# Altium PCB 主板-双BH(1).PcbDoc (part 7 of 13)
Units mm, origin at the board's own origin, x right, y up, seen from the top; angles counter-clockwise.
Board outline 97.69 x 103.45 mm, 2 copper layers (Top Layer, Bottom Layer); 78 components, 75 nets, 243 pads, 279 vias.
Unrouted connection lines stored in the file: 7.
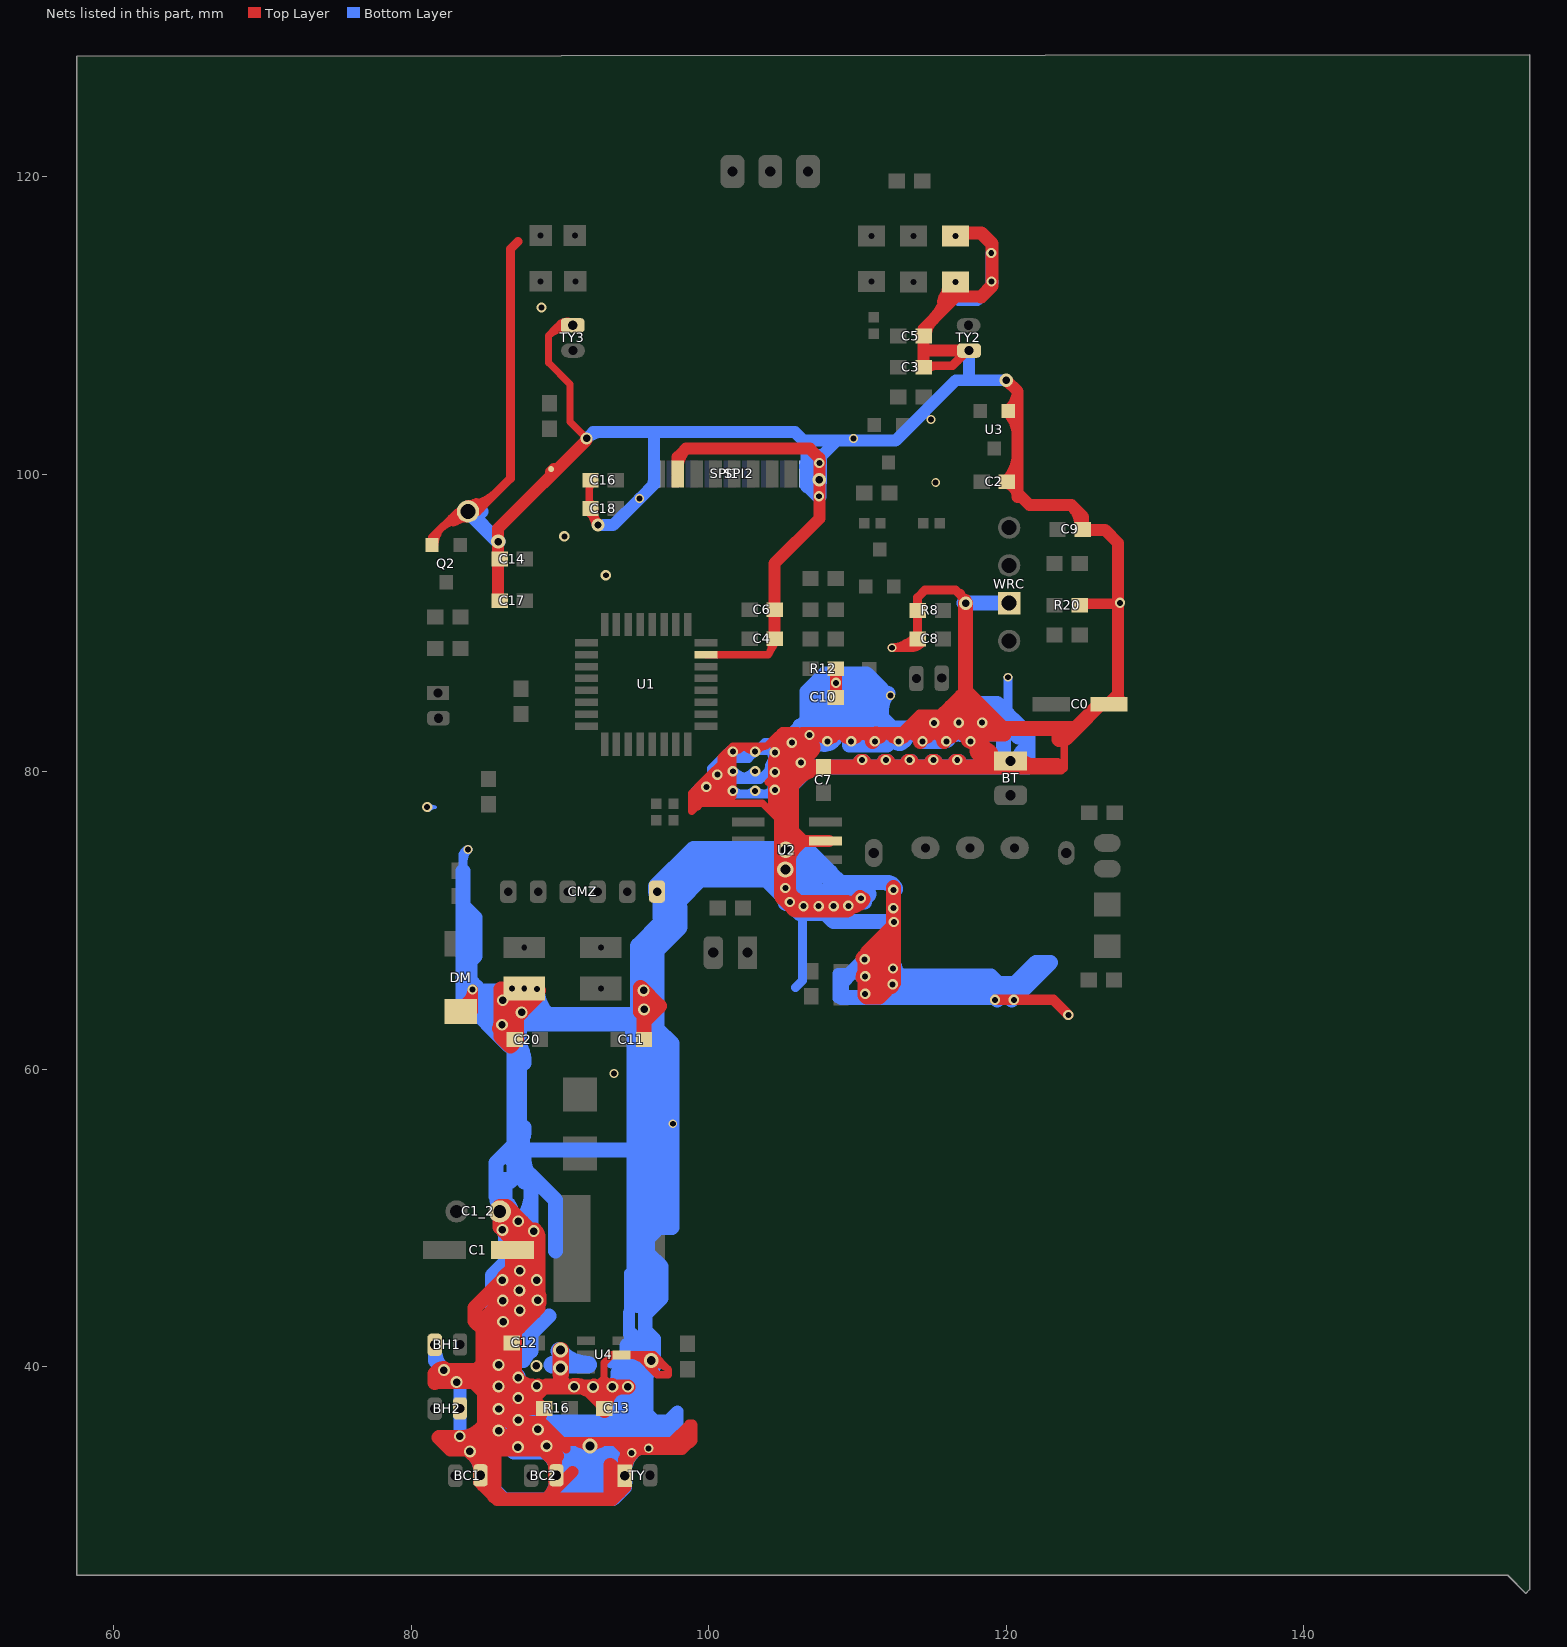
[diagram p7: the nets of this part, all layers, seen from the top]

## Via types
v1: diameter 0.7, hole 0.4, Top Layer to Bottom Layer, 108 vias
v2: diameter 0.68, hole 0.4, Top Layer to Bottom Layer, 87 vias
v3: diameter 0.8, hole 0.5, Top Layer to Bottom Layer, tented both sides, 33 vias
v4: diameter 0.6, hole 0.4, Top Layer to Bottom Layer, 12 vias
v5: diameter 0.9, hole 0.5, Top Layer to Bottom Layer, 8 vias
v6: diameter 0.8, hole 0.5, Top Layer to Bottom Layer, 6 vias
v7: diameter 1, hole 0.75, Top Layer to Bottom Layer, tented both sides, 5 vias
v8: diameter 3.4, hole 2.9, Top Layer to Bottom Layer, 4 vias
v9: diameter 1, hole 0.6, Top Layer to Bottom Layer, tented both sides, 3 vias
v10: diameter 1, hole 0.56, Top Layer to Bottom Layer, tented both sides, 2 vias
v11: diameter 1.1, hole 0.68, Top Layer to Bottom Layer, 2 vias
v12: diameter 0.8, hole 0.4, Top Layer to Bottom Layer, 2 vias
v13: diameter 0.65, hole 0.4, Top Layer to Bottom Layer, tented both sides, 2 vias
v14: diameter 1, hole 0.6, Top Layer to Bottom Layer, tented bottom, 1 vias
v15: diameter 0.7, hole 0.4, Top Layer to Bottom Layer, tented bottom, 1 vias
v16: diameter 0.95, hole 0.5, Top Layer to Bottom Layer, 1 vias
v17: diameter 0.64, hole 0.4, Top Layer to Bottom Layer, 1 vias
v18: diameter 0.62, hole 0.4, Top Layer to Bottom Layer, 1 vias

## Nets (pads, with @x,y where several pads share a name; then routed paths per layer and width w, separated by ;. In a path a pad name is that pad's centre, name@x,y a point inside that pad or via, vN(x,y) a via of type N, cw(c..) or ccw(c..) an arc to the next point about the centre after c; other vN are vias at no path point) (continued)
GND: (continued)
  Top Layer w1: 85.039,42.164 85.039,38.532 85.547,38.024 ; 85.581,31.783 85.581,34.468 ; v3@85.935,62.746 ccw(c87.322,63.547) C20.1@86.908,62 ; v3@86.081,64.708 cw(c87.6,63.403) pad.0@87.6,65.406 ; v3(86.131,45.822) 84.277,43.967 84.277,43.078 84.811,42.545 84.811,40.157 84.404,39.751 ; v3(86.157,44.45) 84.811,43.104 85.166,43.104 ; C1_2.1@86.188,50.365 ccw(c86.81,50.164) 86.348,49.703 ; v3@86.208,43.282 86.208,45.974 86.8,46.566 C1.1@86.8,47.84 C1.1@86.8,48.26 ; 86.23,62.452 cw(c86.77,62.992) v3@86.006,62.992 ; C12.2@86.276,41.437 86.276,37.295 ; v3@86.276,62.929 86.766,63.419 pad.0@86.766,65.406 ; 86.279,49.634 ccw(c85.338,49.382) C1_2.1@85.825,50.225 ; 86.284,40.97 v3@86.284,43.078 ; C12.2@86.309,41.529 86.309,40.03 86.88,39.505 86.944,39.446 86.944,38.799 ; 86.614,44.45 86.614,45.339 ; v1(86.766,65.43) pad.0@86.766,65.406 ; 86.843,36.195 86.652,36.386 ; v3@86.944,39.497 86.944,43.663 v3@86.294,44.313 ; 87.071,63.378 87.071,61.951 86.677,61.557 86.03,62.205 ; v3(87.427,63.83) pad.0@87.427,65.329 ; v3@88.062,45.745 87.68,45.364 87.68,45.229 ; 88.316,37.311 88.316,37.922 ; 88.67,36.195 87.774,36.195 87.376,36.195 87.148,36.423 v3@86.919,36.652 ; 88.91,38.643 88.875,38.608 ; 89,38.649 89.762,38.649 90.957,38.649 92.227,38.65 92.371,38.65 92.964,38.65 92.989,38.65 ; v3(89.103,34.671) 89.298,34.671 89.764,34.671 89.84,34.671 ; v3@89.205,34.569 89.399,34.569 89.738,34.569 89.764,34.595 89.84,34.671 ; 89.764,34.011 89.306,34.468 85.581,34.468 ; 90.043,39.1 v9(90.043,41.123) ; v6(92.227,38.647) 90.957,38.647 91.757,38.647 92.98,37.424 C13.2@92.98,37.2 ; C13.2@92.989,37.2 92.989,38.648 92.989,38.65 ; 92.989,38.71 92.989,38.65 ; TY.2@94.298,32.741 TY.2@94.364,32.674 ; v6@94.564,38.65 93.523,38.65 92.989,38.65 ; C11.2@95.65,62 95.65,63.633 95.428,63.856 v3@95.428,65.507 ; 95.86,63.424 96.685,64.249 ; 105.588,76.124 105.588,79.121 106.782,80.315 BT.2@121.218,80.315 ; v1@109.271,70.968 v1@109.601,70.968 ; v1@110.185,71.552 v1@109.601,70.968 ; v1@110.96,82.245 111.239,82.525 111.252,82.537 ; 111.633,67.869 110.668,67.869 v1@112.42,69.621 ; 111.735,66.167 111.735,66.192 ; 111.735,68.758 111.735,66.531 ; v1@112.166,65.761 v1@112.116,65.811 ; v1@112.344,66.531 111.735,66.531 ; v1@112.42,72.212 v1(112.42,72.06) v1(112.42,70.841) v1@112.42,69.621 ; 114.592,82.537 114.833,82.779 ; 114.706,82.779 115.646,83.718 116.279,84.351 116.98,85.052 117.17,84.861 117.17,84.684 ; 115.265,82.779 116.205,83.718 116.838,84.351 ; 116.027,82.525 116.04,82.537 116.218,82.715 v1(116.815,83.312) ; v5(117.272,91.338) 117.272,85.42 119.786,82.906 ; v1(117.602,82.042) 118.059,82.499 ; 118.681,82.537 119.875,82.537 ; 123.546,82.169 123.546,82.906 ; 124.003,82.245 124.663,82.906 ; 124.003,82.525 124.231,82.525 ; C0.2@126.303,84.546 124.663,82.906 ; 81.585,38.949 cw(c82.611,38.949) v3@82.149,39.866 ; 81.585,38.949 cw(c82.611,38.949) v3@82.149,39.866 ; 81.585,38.949 cw(c82.611,38.949) v3@82.149,39.866 ; 81.585,39.116 cw(c82.367,39.116) v3@82.169,39.873 ; 81.585,39.116 cw(c82.367,39.116) v3@82.169,39.873 ; 81.585,39.116 cw(c82.367,39.116) v3@82.169,39.873 ; 81.758,39.696 cw(c82.194,39.259) v3@82.194,39.876 ; 81.758,39.696 cw(c82.194,39.259) v3@82.194,39.876 ; 81.758,39.696 cw(c82.194,39.259) v3@82.194,39.876 ; v3@81.813,39.751 cw(c81.813,38.181) v3@83.143,39.017 ; v3@81.813,39.751 cw(c81.813,38.181) v3@83.143,39.017 ; v3@81.813,39.751 cw(c81.813,38.181) v3@83.143,39.017 ; v3@81.813,39.751 84.404,39.751 ; v3@81.813,39.751 81.585,39.522 81.585,39.218 81.813,38.989 84.226,38.989 84.912,38.303 84.912,36.068 ; v3@82.124,39.706 ccw(c83.854,41.436) 83.854,38.989 ; v3@82.124,39.706 ccw(c83.854,41.436) 83.854,38.989 ; v3@82.124,39.706 ccw(c83.854,41.436) 83.854,38.989 ; v3@82.977,39.022 cw(c84.404,37.989) 84.404,39.751 ; v3@82.977,39.022 cw(c84.404,37.989) 84.404,39.751 ; v3@82.977,39.022 cw(c84.404,37.989) 84.404,39.751 ; v3@83.261,35.231 ccw(c83.261,37.198) 84.651,35.807 ; v3@83.261,35.231 ccw(c83.261,37.198) 84.651,35.807 ; v3@83.261,35.231 ccw(c83.261,37.198) 84.651,35.807 ; v3@83.82,34.468 84.607,33.68 ; v3@83.82,34.468 82.652,34.468 81.864,35.255 84.099,35.255 84.912,36.068 ; v3@83.82,34.468 84.912,34.468 ; v3@84.236,34.052 cw(c83.154,32.97) BC1.1@84.684,32.97 ; v3@84.236,34.052 cw(c83.154,32.97) BC1.1@84.684,32.97 ; v3@84.236,34.052 cw(c83.154,32.97) BC1.1@84.684,32.97 ; 84.607,33.68 cw(c84.202,33.275) BC1.1@84.681,32.959 ; 84.607,33.68 cw(c84.202,33.275) BC1.1@84.681,32.959 ; 84.607,33.68 cw(c84.202,33.275) BC1.1@84.681,32.959 ; BC1.1@84.651,32.985 cw(c85.052,32.534) 85.479,32.961 ; BC1.1@84.651,32.985 cw(c85.052,32.534) 85.479,32.961 ; BC1.1@84.651,32.985 cw(c85.052,32.534) 85.479,32.961 ; BC1.1@84.668,32.45 cw(c84.411,31.308) 85.581,31.308 ; BC1.1@84.668,32.45 cw(c84.411,31.308) 85.581,31.308 ; BC1.1@84.668,32.45 cw(c84.411,31.308) 85.581,31.308 ; BC1.1@84.673,32.952 ccw(c83.861,34.468) 85.581,34.468 ; BC1.1@84.673,32.952 ccw(c83.861,34.468) 85.581,34.468 ; BC1.1@84.673,32.952 ccw(c83.861,34.468) 85.581,34.468 ; BC1.1@84.675,32.953 ccw(c83.651,34.468) 85.479,34.468 ; BC1.1@84.675,32.953 ccw(c83.651,34.468) 85.479,34.468 ; BC1.1@84.675,32.953 ccw(c83.651,34.468) 85.479,34.468 ; BC1.1@84.678,32.956 ccw(c84.113,33.521) 84.912,33.521 ; BC1.1@84.678,32.956 ccw(c84.113,33.521) 84.912,33.521 ; BC1.1@84.678,32.956 ccw(c84.113,33.521) 84.912,33.521 ; BC1.1@84.678,32.956 ccw(c84.113,33.521) 84.912,33.521 ; BC1.1@84.678,32.956 ccw(c84.113,33.521) 84.912,33.521 ; BC1.1@84.678,32.956 ccw(c84.113,33.521) 84.912,33.521 ; BC1.1@84.889,33.425 cw(c84.693,32.559) 85.581,32.559 ; BC1.1@84.889,33.425 cw(c84.693,32.559) 85.581,32.559 ; BC1.1@84.889,33.425 cw(c84.693,32.559) 85.581,32.559 ; 84.912,34.468 84.912,36.068 ; 84.912,34.468 85.479,34.468 ; 84.912,34.468 84.912,33.528 85.479,32.961 ; 84.912,36.068 85.547,35.433 ; 85.007,35.973 ccw(c85.877,36.843) v3@85.877,35.612 ; 85.007,35.973 ccw(c85.877,36.843) v3@85.877,35.612 ; 85.007,35.973 ccw(c85.877,36.843) v3@85.877,35.612 ; 85.039,38.35 cw(c87.66,38.35) v3@85.807,40.203 ; 85.039,38.35 cw(c87.66,38.35) v3@85.807,40.203 ; 85.039,38.35 cw(c87.66,38.35) v3@85.807,40.203 ; 85.039,40.466 ccw(c87.66,40.466) v3@85.807,38.613 ; 85.039,40.466 ccw(c87.66,40.466) v3@85.807,38.613 ; 85.039,40.466 ccw(c87.66,40.466) v3@85.807,38.613 ; 85.039,41.914 ccw(c87.66,41.914) v3@85.807,40.061 ; 85.039,41.914 ccw(c87.66,41.914) v3@85.807,40.061 ; 85.039,41.914 ccw(c87.66,41.914) v3@85.807,40.061 ; 85.166,43.104 ccw(c85.81,43.748) v3@86.228,42.939 ; 85.166,43.104 ccw(c85.81,43.748) v3@86.228,42.939 ; 85.166,43.104 ccw(c85.81,43.748) v3@86.228,42.939 ; 85.166,43.104 85.547,42.723 85.547,38.024 ; 85.479,32.961 85.479,34.468 ; 85.479,34.468 85.479,35.247 85.547,35.247 ; 85.479,34.468 85.547,34.468 ; 85.479,34.992 cw(c86.598,34.992) v3@85.807,35.783 ; 85.479,34.992 cw(c86.598,34.992) v3@85.807,35.783 ; 85.479,34.992 cw(c86.598,34.992) v3@85.807,35.783 ; 85.479,35.1 cw(c86.357,35.1) v3@85.816,35.791 ; 85.479,35.1 cw(c86.357,35.1) v3@85.816,35.791 ; 85.479,35.1 cw(c86.357,35.1) v3@85.816,35.791 ; 85.547,34.468 85.547,35.247 ; 85.547,34.468 85.581,34.468 ; 85.547,35.157 cw(c86.433,35.157) v3@85.807,35.783 ; 85.547,35.157 cw(c86.433,35.157) v3@85.807,35.783 ; 85.547,35.157 cw(c86.433,35.157) v3@85.807,35.783 ; 85.547,35.157 cw(c86.433,35.157) v3@85.807,35.783 ; 85.547,35.157 cw(c86.433,35.157) v3@85.807,35.783 ; 85.547,35.157 cw(c86.433,35.157) v3@85.807,35.783 ; 85.547,35.157 cw(c86.433,35.157) v3@85.807,35.783 ; 85.547,35.157 cw(c86.433,35.157) v3@85.807,35.783 ; 85.547,35.157 cw(c86.433,35.157) v3@85.807,35.783 ; 85.547,35.247 85.547,35.433 ; 85.547,35.247 85.581,35.247 ; 85.547,35.28 cw(c86.169,35.28) v3@85.822,35.795 ; 85.547,35.28 cw(c86.169,35.28) v3@85.822,35.795 ; 85.547,35.28 cw(c86.169,35.28) v3@85.822,35.795 ; 85.547,35.28 cw(c86.169,35.28) v3@85.822,35.795 ; 85.547,35.28 cw(c86.169,35.28) v3@85.822,35.795 ; 85.547,35.28 cw(c86.169,35.28) v3@85.822,35.795 ; 85.547,35.433 85.581,35.4 85.581,35.247 ; 85.547,35.433 85.547,38.024 ; 85.547,36.268 ccw(c86.433,36.268) v3@85.807,35.642 ; 85.547,36.268 ccw(c86.433,36.268) v3@85.807,35.642 ; 85.547,36.268 ccw(c86.433,36.268) v3@85.807,35.642 ; 85.547,36.604 cw(c86.433,36.604) v3@85.807,37.231 ; 85.547,36.604 cw(c86.433,36.604) v3@85.807,37.231 ; 85.547,36.604 cw(c86.433,36.604) v3@85.807,37.231 ; 85.547,37.716 ccw(c86.433,37.716) v3@85.807,37.089 ; 85.547,37.716 ccw(c86.433,37.716) v3@85.807,37.089 ; 85.547,37.716 ccw(c86.433,37.716) v3@85.807,37.089 ; 85.547,38.024 86.276,37.295 ; 85.547,38.128 cw(c86.433,38.128) v3@85.807,38.755 ; 85.547,38.128 cw(c86.433,38.128) v3@85.807,38.755 ; 85.547,38.128 cw(c86.433,38.128) v3@85.807,38.755 ; 85.547,38.128 cw(c86.433,38.128) v3@85.807,38.755 ; 85.547,38.128 cw(c86.433,38.128) v3@85.807,38.755 ; 85.547,38.128 cw(c86.433,38.128) v3@85.807,38.755 ; 85.547,38.128 cw(c86.433,38.128) v3@85.807,38.755 ; 85.547,38.128 cw(c86.433,38.128) v3@85.807,38.755 ; 85.547,38.128 cw(c86.433,38.128) v3@85.807,38.755 ; 85.547,39.24 ccw(c86.433,39.24) v3@85.807,38.613 ; 85.547,39.24 ccw(c86.433,39.24) v3@85.807,38.613 ; 85.547,39.24 ccw(c86.433,39.24) v3@85.807,38.613 ; 85.547,39.576 cw(c86.433,39.576) v3@85.807,40.203 ; 85.547,39.576 cw(c86.433,39.576) v3@85.807,40.203 ; 85.547,39.576 cw(c86.433,39.576) v3@85.807,40.203 ; 85.547,40.688 ccw(c86.433,40.688) v3@85.807,40.061 ; 85.547,40.688 ccw(c86.433,40.688) v3@85.807,40.061 ; 85.547,40.688 ccw(c86.433,40.688) v3@85.807,40.061 ; 85.547,41.736 cw(c87.474,41.736) v3@86.111,43.098 ; 85.547,41.736 cw(c87.474,41.736) v3@86.111,43.098 ; 85.547,41.736 cw(c87.474,41.736) v3@86.111,43.098 ; 85.547,42.323 cw(c86.378,42.323) v3@86.155,43.124 ; 85.547,42.323 cw(c86.378,42.323) v3@86.155,43.124 ; 85.547,42.323 cw(c86.378,42.323) v3@86.155,43.124 ; 85.581,34.468 85.581,35.247 ; 85.581,35.237 cw(c86.352,35.237) v3@85.807,35.783 ; 85.581,35.237 cw(c86.352,35.237) v3@85.807,35.783 ; 85.581,35.237 cw(c86.352,35.237) v3@85.807,35.783 ; 85.581,35.237 cw(c86.352,35.237) v3@85.807,35.783 ; 85.581,35.237 cw(c86.352,35.237) v3@85.807,35.783 ; 85.581,35.237 cw(c86.352,35.237) v3@85.807,35.783 ; 85.581,35.237 cw(c86.352,35.237) v3@85.807,35.783 ; 85.581,35.237 cw(c86.352,35.237) v3@85.807,35.783 ; 85.581,35.237 cw(c86.352,35.237) v3@85.807,35.783 ; 85.581,35.247 87.165,35.247 ; 85.581,35.281 cw(c86.251,35.281) v3@85.812,35.788 ; 85.581,35.281 cw(c86.251,35.281) v3@85.812,35.788 ; 85.581,35.281 cw(c86.251,35.281) v3@85.812,35.788 ; 85.671,37.9 cw(c84.931,37.16) v3@85.977,37.16 ; 85.671,37.9 cw(c84.931,37.16) v3@85.977,37.16 ; 85.671,37.9 cw(c84.931,37.16) v3@85.977,37.16 ; v3@85.778,38.694 ccw(c87.499,38.519) 86.276,37.295 ; v3@85.778,38.694 ccw(c87.499,38.519) 86.276,37.295 ; v3@85.778,38.694 ccw(c87.499,38.519) 86.276,37.295 ; C1_2.1@85.793,50.247 cw(c84.898,49.135) v3@86.317,49.288 ; C1_2.1@85.793,50.247 cw(c84.898,49.135) v3@86.317,49.288 ; C1_2.1@85.793,50.247 cw(c84.898,49.135) v3@86.317,49.288 ; v3@85.807,35.642 ccw(c86.759,36.594) 86.759,35.247 ; v3@85.807,35.642 ccw(c86.759,36.594) 86.759,35.247 ; v3@85.807,35.642 ccw(c86.759,36.594) 86.759,35.247 ; C1_2.1@85.825,50.225 cw(c85.111,48.989) v3@86.49,49.358 ; C1_2.1@85.825,50.225 cw(c85.111,48.989) v3@86.49,49.358 ; C1_2.1@85.825,50.225 cw(c85.111,48.989) v3@86.49,49.358 ; 85.839,35.247 cw(c85.839,33.261) v3@87.244,34.666 ; 85.839,35.247 cw(c85.839,33.261) v3@87.244,34.666 ; 85.839,35.247 cw(c85.839,33.261) v3@87.244,34.666 ; v3@85.877,37.26 cw(c85.877,36.214) 86.617,36.954 ; v3@85.877,37.26 cw(c85.877,36.214) 86.617,36.954 ; v3@85.877,37.26 cw(c85.877,36.214) 86.617,36.954 ; v3@85.906,40.228 cw(c85.747,39.688) 86.309,39.688 ; v3@85.906,40.228 cw(c85.747,39.688) 86.309,39.688 ; v3@85.906,40.228 cw(c85.747,39.688) 86.309,39.688 ; v3@85.927,37.247 cw(c85.585,36.647) 86.276,36.647 ; v3@85.927,37.247 cw(c85.585,36.647) 86.276,36.647 ; v3@85.927,37.247 cw(c85.585,36.647) 86.276,36.647 ; v3@85.927,37.247 cw(c85.585,36.647) 86.276,36.647 ; v3@85.927,37.247 cw(c85.585,36.647) 86.276,36.647 ; v3@85.927,37.247 cw(c85.585,36.647) 86.276,36.647 ; v3@85.934,37.243 cw(c85.495,36.597) 86.276,36.597 ; v3@85.934,37.243 cw(c85.495,36.597) 86.276,36.597 ; v3@85.934,37.243 cw(c85.495,36.597) 86.276,36.597 ; 85.947,37.865 cw(c85.267,37.472) v3@85.966,37.115 ; 85.947,37.865 cw(c85.267,37.472) v3@85.966,37.115 ; 85.947,37.865 cw(c85.267,37.472) v3@85.966,37.115 ; 85.947,37.865 cw(c85.267,37.472) v3@85.966,37.115 ; 85.947,37.865 cw(c85.267,37.472) v3@85.966,37.115 ; 85.947,37.865 cw(c85.267,37.472) v3@85.966,37.115 ; v3@85.948,37.089 ccw(c85.157,37.881) 86.276,37.881 ; v3@85.948,37.089 ccw(c85.157,37.881) 86.276,37.881 ; v3@85.948,37.089 ccw(c85.157,37.881) 86.276,37.881 ; v3@85.948,38.613 ccw(c85.157,39.405) 86.276,39.405 ; v3@85.948,38.613 ccw(c85.157,39.405) 86.276,39.405 ; v3@85.948,38.613 ccw(c85.157,39.405) 86.276,39.405 ; v3@85.948,38.755 cw(c85.157,37.964) 86.276,37.964 ; v3@85.948,38.755 cw(c85.157,37.964) 86.276,37.964 ; v3@85.948,38.755 cw(c85.157,37.964) 86.276,37.964 ; v3@85.948,40.061 ccw(c85.076,40.933) 86.309,40.933 ; v3@85.948,40.061 ccw(c85.157,40.852) 86.276,40.852 ; v3@85.948,40.061 ccw(c85.076,40.933) 86.309,40.933 ; v3@85.948,40.061 ccw(c85.157,40.852) 86.276,40.852 ; v3@85.948,40.061 ccw(c85.076,40.933) 86.309,40.933 ; v3@85.948,40.061 ccw(c85.157,40.852) 86.276,40.852 ; v3@85.948,40.203 cw(c85.157,39.412) 86.276,39.412 ; v3@85.948,40.203 cw(c85.157,39.412) 86.276,39.412 ; v3@85.948,40.203 cw(c85.157,39.412) 86.276,39.412 ; C1_2.1@85.984,50.194 cw(c86.228,48.407) v3@87.503,49.682 ; C1_2.1@85.984,50.194 cw(c86.228,48.407) v3@87.503,49.682 ; C1_2.1@85.984,50.194 cw(c86.228,48.407) v3@87.503,49.682 ; v3@86.006,62.992 ccw(c87.849,62.992) 86.546,61.688 cw(c87.849,62.992) v3@86.006,62.992 ; 86.03,62.205 ccw(c86.633,62.808) C20.1@86.908,62 ; 86.03,62.205 ccw(c86.633,62.808) C20.1@86.908,62 ; 86.03,62.205 ccw(c86.633,62.808) C20.1@86.908,62 ; 86.03,62.205 86.03,65.406 pad.0@86.766,65.406 ; 86.03,64.12 ccw(c89.028,64.12) C20.1@86.908,62 ; 86.03,64.12 ccw(c89.028,64.12) C20.1@86.908,62 ; 86.03,64.12 ccw(c89.028,64.12) C20.1@86.908,62 ; v3@86.131,49.3 cw(c86.131,47.763) 87.218,48.85 ; v3@86.131,49.3 cw(c86.131,47.763) 87.218,48.85 ; v3@86.131,49.3 cw(c86.131,47.763) 87.218,48.85 ; C1_2.1@86.148,50.595 ccw(c87.276,51.47) v3@87.097,50.053 ; C1_2.1@86.148,50.595 ccw(c87.276,51.47) v3@87.097,50.053 ; C1_2.1@86.148,50.595 ccw(c87.276,51.47) v3@87.097,50.053 ; v3@86.181,44.547 cw(c86.043,43.993) 86.614,43.993 ; v3@86.181,44.547 cw(c86.043,43.993) 86.614,43.993 ; v3@86.181,44.547 cw(c86.043,43.993) 86.614,43.993 ; v3@86.184,45.907 cw(c85.714,45.139) 86.614,45.139 ; v3@86.184,45.907 cw(c85.269,44.413) 87.02,44.413 ; v3@86.184,45.907 cw(c85.714,45.139) 86.614,45.139 ; v3@86.184,45.907 cw(c85.269,44.413) 87.02,44.413 ; v3@86.184,45.907 cw(c85.714,45.139) 86.614,45.139 ; v3@86.184,45.907 cw(c85.269,44.413) 87.02,44.413 ; C1_2.1@86.194,50.389 ccw(c86.976,50.222) 86.411,49.657 ; C1_2.1@86.194,50.389 ccw(c86.976,50.222) 86.411,49.657 ; C1_2.1@86.194,50.389 ccw(c86.976,50.222) 86.411,49.657 ; v3@86.197,49.124 ccw(c85.74,49.651) C1_2.1@86.397,49.883 ; v3@86.197,49.124 ccw(c85.74,49.651) C1_2.1@86.397,49.883 ; v3@86.197,49.124 ccw(c85.74,49.651) C1_2.1@86.397,49.883 ; v3@86.197,49.124 ccw(c85.74,49.651) C1_2.1@86.397,49.883 ; v3@86.197,49.124 ccw(c85.74,49.651) C1_2.1@86.397,49.883 ; v3@86.197,49.124 ccw(c85.74,49.651) C1_2.1@86.397,49.883 ; C1_2.1@86.197,50.403 ccw(c88.317,50.074) 86.8,48.557 ; C1_2.1@86.197,50.403 ccw(c88.317,50.074) 86.8,48.557 ; C1_2.1@86.197,50.403 ccw(c88.317,50.074) 86.8,48.557 ; v3@86.199,45.748 ccw(c84.465,47.625) C1.1@87.02,47.625 ; v3@86.199,45.748 ccw(c84.465,47.625) C1.1@87.02,47.625 ; v3@86.199,45.748 ccw(c84.465,47.625) C1.1@87.02,47.625 ; C1_2.1@86.2,50.442 ccw(c87.586,50.442) 86.606,49.462 ; C1_2.1@86.2,50.442 ccw(c87.586,50.442) 86.606,49.462 ; C1_2.1@86.2,50.442 ccw(c87.586,50.442) 86.606,49.462 ; v3@86.202,45.892 cw(c85.208,44.898) 86.614,44.898 ; v3@86.202,45.892 cw(c85.208,44.898) 86.614,44.898 ; v3@86.202,45.892 cw(c85.208,44.898) 86.614,44.898 ; v3@86.215,49.145 ccw(c85.689,49.489) C1_2.1@86.233,49.803 ; v3@86.215,49.145 ccw(c85.689,49.489) C1_2.1@86.233,49.803 ; v3@86.215,49.145 ccw(c85.689,49.489) C1_2.1@86.233,49.803 ; v3@86.215,49.145 ccw(c85.689,49.489) C1_2.1@86.233,49.803 ; v3@86.228,44.379 ccw(c85.294,45.312) 86.614,45.312 ; v3@86.228,44.379 ccw(c85.294,45.312) 86.614,45.312 ; v3@86.228,44.379 ccw(c85.294,45.312) 86.614,45.312 ; v3@86.253,43.098 cw(c84.584,41.429) C12.2@86.944,41.429 ; v3@86.253,43.098 cw(c84.584,41.429) C12.2@86.944,41.429 ; v3@86.253,43.098 cw(c84.584,41.429) C12.2@86.944,41.429 ; v3@86.255,45.836 cw(c87.634,44.96) v3@87.278,46.554 ; v3@86.255,45.836 cw(c87.634,44.96) v3@87.278,46.554 ; v3@86.255,45.836 cw(c87.634,44.96) v3@87.278,46.554 ; 86.276,37.295 86.276,36.836 86.276,36.762 86.652,36.386 ; 86.276,37.295 v3@86.919,36.652 ; 86.276,40.576 cw(c87.724,40.576) C12.2@86.7,41.6 ; 86.276,40.576 cw(c87.724,40.576) C12.2@86.7,41.6 ; 86.276,40.576 cw(c87.724,40.576) C12.2@86.7,41.6 ; 86.284,40.845 cw(c87.176,40.845) C12.2@86.7,41.6 ; 86.284,40.845 cw(c87.176,40.845) C12.2@86.7,41.6 ; 86.284,40.845 cw(c87.176,40.845) C12.2@86.7,41.6 ; 86.284,42.605 ccw(c87.705,42.605) C12.2@86.7,41.6 ; 86.284,42.605 ccw(c87.705,42.605) C12.2@86.7,41.6 ; 86.284,42.605 ccw(c87.705,42.605) C12.2@86.7,41.6 ; v3@86.294,44.313 cw(c86.294,42.806) v3@87.371,43.86 ; v3@86.294,44.313 ccw(c86.294,45.439) v3@87.37,45.106 ; v3@86.294,44.313 cw(c86.294,42.806) v3@87.371,43.86 ; v3@86.294,44.313 ccw(c86.294,45.439) v3@87.37,45.106 ; v3@86.294,44.313 cw(c86.294,42.806) v3@87.371,43.86 ; v3@86.294,44.313 ccw(c86.294,45.439) v3@87.37,45.106 ; v3@86.294,44.313 87.237,44.313 ; 86.309,40.657 cw(c87.643,40.657) C12.2@86.7,41.6 ; 86.309,40.657 cw(c87.643,40.657) C12.2@86.7,41.6 ; 86.309,40.657 cw(c87.643,40.657) C12.2@86.7,41.6 ; 86.373,36.664 ccw(c87.198,37.489) v3@87.198,36.323 ; 86.373,36.664 ccw(c87.198,37.489) v3@87.198,36.323 ; 86.373,36.664 ccw(c87.198,37.489) v3@87.198,36.323 ; 86.411,49.657 87.342,48.726 ; 86.43,46.196 cw(c87.3,45.326) v3@87.3,46.557 ; 86.43,46.196 cw(c87.3,45.326) v3@87.3,46.557 ; 86.43,46.196 cw(c87.3,45.326) v3@87.3,46.557 ; 86.539,45.449 ccw(c87.398,46.115) v3@87.262,45.037 ; 86.539,45.449 ccw(c87.398,46.115) v3@87.262,45.037 ; 86.539,45.449 ccw(c87.398,46.115) v3@87.262,45.037 ; 86.614,44.184 cw(c87.803,44.184) v3@87.226,45.223 ; 86.614,44.184 cw(c87.803,44.184) v3@87.226,45.223 ; 86.614,44.184 cw(c87.803,44.184) v3@87.226,45.223 ; 86.647,43.96 ccw(c87.3,44.613) v3@87.3,43.69 ; 86.647,43.96 ccw(c87.3,44.613) v3@87.3,43.69 ; 86.647,43.96 ccw(c87.3,44.613) v3@87.3,43.69 ; 86.652,36.386 cw(c87.046,35.992) v3@87.232,36.517 ; 86.652,36.386 cw(c87.046,35.992) v3@87.232,36.517 ; 86.652,36.386 cw(c87.046,35.992) v3@87.232,36.517 ; 86.652,36.386 86.689,36.423 v3@86.919,36.652 ; C12.2@86.7,41.6 ccw(c86.133,41.927) C12.2@86.765,42.097 ; C12.2@86.7,41.6 ccw(c86.133,41.927) C12.2@86.765,42.097 ; C12.2@86.7,41.6 ccw(c86.133,41.927) C12.2@86.765,42.097 ; C1.1@86.713,47.79 cw(c85.71,47.211) 86.829,46.911 ; C1.1@86.713,47.79 cw(c85.71,47.211) 86.829,46.911 ; C1.1@86.713,47.79 cw(c85.71,47.211) 86.829,46.911 ; C1.1@86.729,47.769 cw(c86.026,47.066) 87.02,47.066 ; C1.1@86.729,47.769 cw(c86.026,47.066) 87.02,47.066 ; C1.1@86.729,47.769 cw(c86.026,47.066) 87.02,47.066 ; pad.0@86.766,65.406 cw(c85.841,65.406) 86.195,64.551 ccw(c85.841,65.406) pad.0@86.766,65.406 ; pad.0@86.766,65.406 pad.0@87.6,65.406 ; C1.1@86.8,47.422 ccw(c88.265,47.422) v3@87.229,46.386 ; C1.1@86.8,47.422 ccw(c88.265,47.422) v3@87.229,46.386 ; C1.1@86.8,47.422 ccw(c88.265,47.422) v3@87.229,46.386 ; 86.8,48.557 85.95,49.407 85.95,50.775 86.411,50.775 v3@87.503,49.682 ; v3@86.919,36.652 cw(c88.393,35.178) R16.2@88.9,37.2 ; v3@86.919,36.652 ccw(c85.938,37.633) v3@87.296,37.916 ; v3@86.919,36.652 cw(c88.393,35.178) R16.2@88.9,37.2 ; v3@86.919,36.652 ccw(c85.938,37.633) v3@87.296,37.916 ; v3@86.919,36.652 cw(c88.393,35.178) R16.2@88.9,37.2 ; v3@86.919,36.652 ccw(c85.938,37.633) v3@87.296,37.916 ; v3@86.919,36.652 88.875,38.608 ; 86.944,38.799 cw(c86.087,37.942) v3@87.298,37.892 ; 86.944,38.799 cw(c86.087,37.942) v3@87.298,37.892 ; 86.944,38.799 cw(c86.087,37.942) v3@87.298,37.892 ; 86.944,38.799 87.136,38.608 ; 86.944,38.897 cw(c87.57,38.897) v3@87.127,39.339 ; 86.944,38.897 cw(c87.57,38.897) v3@87.127,39.339 ; 86.944,38.897 cw(c87.57,38.897) v3@87.127,39.339 ; 86.944,39.64 ccw(c87.57,39.64) v3@87.127,39.198 ; 86.944,39.64 ccw(c87.57,39.64) v3@87.127,39.198 ; 86.944,39.64 ccw(c87.57,39.64) v3@87.127,39.198 ; 86.944,43.173 cw(c87.917,43.173) v3@87.229,43.86 ; 86.944,43.173 cw(c87.917,43.173) v3@87.229,43.86 ; 86.944,43.173 cw(c87.917,43.173) v3@87.229,43.86 ; 86.993,44.598 cw(c87.678,44.701) v3@87.206,45.209 ; 86.993,44.598 cw(c87.678,44.701) v3@87.206,45.209 ; 86.993,44.598 cw(c87.678,44.701) v3@87.206,45.209 ; 87.02,44.764 cw(c87.646,44.764) v3@87.204,45.207 ; 87.02,44.764 cw(c87.646,44.764) v3@87.204,45.207 ; 87.02,44.764 cw(c87.646,44.764) v3@87.204,45.207 ; 87.02,45.508 ccw(c87.646,45.508) v3@87.204,45.065 ; 87.02,45.508 ccw(c87.646,45.508) v3@87.204,45.065 ; 87.02,45.508 ccw(c87.646,45.508) v3@87.204,45.065 ; 87.02,46.023 cw(c87.733,46.023) v3@87.229,46.527 ; 87.02,46.023 cw(c87.733,46.023) v3@87.229,46.527 ; 87.02,46.023 cw(c87.733,46.023) v3@87.229,46.527 ; 87.02,46.89 ccw(c87.733,46.89) v3@87.229,46.386 ; 87.02,46.89 ccw(c87.733,46.89) v3@87.229,46.386 ; 87.02,46.89 ccw(c87.733,46.89) v3@87.229,46.386 ; C1.1@87.02,47.625 C1.1@87.494,48.099 ; C1.1@87.02,47.625 87.02,44.729 v3@87.237,44.946 ; 87.071,63.213 cw(c88.044,63.213) v3@87.356,63.901 ; 87.071,63.213 cw(c88.044,63.213) v3@87.356,63.901 ; 87.071,63.213 cw(c88.044,63.213) v3@87.356,63.901 ; 87.071,63.255 cw(c87.947,63.255) v3@87.36,63.904 ; 87.071,63.255 cw(c87.947,63.255) v3@87.36,63.904 ; 87.071,63.255 cw(c87.947,63.255) v3@87.36,63.904 ; v3@87.073,34.59 cw(c88.285,34.651) 87.427,35.509 ; v3@87.073,34.59 cw(c88.285,34.651) 87.427,35.509 ; v3@87.073,34.59 cw(c88.285,34.651) 87.427,35.509 ; v3@87.089,34.541 cw(c87.565,34.847) 87.165,35.247 ; v3@87.089,34.541 cw(c87.565,34.847) 87.165,35.247 ; v3@87.089,34.541 cw(c87.565,34.847) 87.165,35.247 ; v3@87.098,36.423 cw(c88.086,36.423) 87.387,37.121 ; v3@87.098,36.423 cw(c88.086,36.423) 87.387,37.121 ; v3@87.098,36.423 cw(c88.086,36.423) 87.387,37.121 ; v3@87.102,36.448 cw(c87.985,36.212) 87.528,37.004 ; v3@87.102,36.448 cw(c87.985,36.212) 87.528,37.004 ; v3@87.102,36.448 cw(c87.985,36.212) 87.528,37.004 ; v3@87.102,36.448 cw(c87.985,36.212) 87.528,37.004 ; v3@87.102,36.448 cw(c87.985,36.212) 87.528,37.004 ; v3@87.102,36.448 cw(c87.985,36.212) 87.528,37.004 ; v3@87.103,36.391 cw(c87.924,36.664) 87.175,37.096 ; v3@87.103,36.391 cw(c87.924,36.664) 87.175,37.096 ; v3@87.103,36.391 cw(c87.924,36.664) 87.175,37.096 ; v3@87.105,49.819 ccw(c88.073,49.457) 87.342,48.726 ; v3@87.105,49.819 ccw(c88.073,49.457) 87.342,48.726 ; v3@87.105,49.819 ccw(c88.073,49.457) 87.342,48.726 ; v3@87.126,39.337 ccw(c87.505,38.978) 87.136,38.608 ; v3@87.126,39.337 ccw(c87.505,38.978) 87.136,38.608 ; v3@87.126,39.337 ccw(c87.505,38.978) 87.136,38.608 ; v3@87.127,37.967 cw(c88.676,36.418) v3@88.676,38.608 ; v3@87.127,37.967 cw(c88.676,36.418) v3@88.676,38.608 ; v3@87.127,37.967 cw(c88.676,36.418) v3@88.676,38.608 ; v3@87.127,39.198 ccw(c88.551,40.621) v3@88.551,38.608 ; v3@87.127,39.198 ccw(c88.551,40.621) v3@88.551,38.608 ; v3@87.127,39.198 ccw(c88.551,40.621) v3@88.551,38.608 ; 87.136,38.608 cw(c86.643,38.115) v3@87.291,37.859 ; 87.136,38.608 cw(c86.643,38.115) v3@87.291,37.859 ; 87.136,38.608 cw(c86.643,38.115) v3@87.291,37.859 ; 87.136,38.608 87.681,38.608 88.875,38.608 ; 87.165,35.247 87.427,35.509 ; v3@87.198,37.796 ccw(c87.198,39.883) v3@88.674,38.407 ; v3@87.198,37.796 ccw(c87.198,39.883) v3@88.674,38.407 ; v3@87.198,37.796 ccw(c87.198,39.883) v3@88.674,38.407 ; 87.237,42.66 ccw(c86.551,43.346) v3@87.386,43.841 ; 87.237,42.66 ccw(c86.551,43.346) v3@87.386,43.841 ; 87.237,42.66 ccw(c86.551,43.346) v3@87.386,43.841 ; 87.237,42.66 87.237,44.313 ; 87.237,42.66 88.536,43.959 ; 87.237,44.313 v3@87.237,44.946 ; 87.237,44.313 87.493,44.313 87.503,44.323 ; v3@87.237,44.946 v3@87.503,45.212 ; v3@87.263,43.697 ccw(c87.7,44.794) 88.536,43.959 ; v3@87.263,43.697 ccw(c87.7,44.794) 88.536,43.959 ; v3@87.263,43.697 ccw(c87.7,44.794) 88.536,43.959 ; v3@87.269,49.855 cw(c86.704,49.29) 87.503,49.29 ; v3@87.269,49.855 cw(c86.704,49.29) 87.503,49.29 ; v3@87.269,49.855 cw(c86.704,49.29) 87.503,49.29 ; v3@87.274,45.236 cw(c87.274,44.272) 87.956,44.954 ; v3@87.274,45.236 cw(c87.274,44.272) 87.956,44.954 ; v3@87.274,45.236 cw(c87.274,44.272) 87.956,44.954 ; 87.342,48.726 cw(c86.738,48.121) C1.1@87.554,47.869 ; 87.342,48.726 cw(c86.738,48.121) C1.1@87.554,47.869 ; 87.342,48.726 cw(c86.738,48.121) C1.1@87.554,47.869 ; v3@87.345,45.207 cw(c86.537,44.398) 87.68,44.398 ; v3@87.345,45.207 cw(c86.537,44.398) 87.68,44.398 ; v3@87.345,45.207 cw(c86.537,44.398) 87.68,44.398 ; v3@87.371,43.719 ccw(c86.623,44.466) 87.68,44.466 ; v3@87.371,43.719 ccw(c86.623,44.466) 87.68,44.466 ; v3@87.371,43.719 ccw(c86.623,44.466) 87.68,44.466 ; v3@87.371,43.719 ccw(c86.623,44.466) 87.68,44.466 ; v3@87.371,43.719 ccw(c86.623,44.466) 87.68,44.466 ; v3@87.371,43.719 ccw(c86.623,44.466) 87.68,44.466 ; 87.427,35.509 87.49,35.573 ; 87.427,64.289 cw(c88.742,64.289) pad.0@87.812,65.22 ; 87.427,64.289 cw(c88.742,64.289) pad.0@87.812,65.22 ; 87.427,64.289 cw(c88.742,64.289) pad.0@87.812,65.22 ; 87.49,35.573 cw(c88.306,34.757) v3@88.539,35.887 ; 87.49,35.573 cw(c88.306,34.757) v3@88.539,35.887 ; 87.49,35.573 cw(c88.306,34.757) v3@88.539,35.887 ; 87.49,35.573 87.744,35.827 ; C1.1@87.494,48.099 C1.1@87.503,48.108 ; C1.1@87.494,48.099 C1.1@87.503,48.09 ; 87.503,44.323 cw(c88.217,43.609) v3@88.524,44.571 ; 87.503,44.323 cw(c88.217,43.609) v3@88.524,44.571 ; 87.503,44.323 cw(c88.217,43.609) v3@88.524,44.571 ; 87.503,44.323 87.68,44.5 ; 87.503,44.323 v3@87.503,45.212 ; v3@87.503,45.212 v3@87.6,45.309 ; v3@87.503,45.212 87.68,45.212 ; C1.1@87.503,47.244 cw(c88.246,47.244) C1.1@87.721,47.769 ; C1.1@87.503,47.244 cw(c88.246,47.244) C1.1@87.721,47.769 ; C1.1@87.503,47.244 cw(c88.246,47.244) C1.1@87.721,47.769 ; C1.1@87.503,47.869 cw(c89.158,47.869) v3@88.181,49.204 ; C1.1@87.503,47.869 cw(c89.158,47.869) v3@88.181,49.204 ; C1.1@87.503,47.869 cw(c89.158,47.869) v3@88.181,49.204 ; C1.1@87.503,48.09 C1.1@87.503,48.108 ; C1.1@87.503,48.09 87.503,45.406 v3@87.6,45.309 ; C1.1@87.503,48.108 88.036,48.641 ; C1.1@87.503,48.108 v3@87.503,49.682 ; C1.1@87.503,48.436 ccw(c88.246,48.436) C1.1@87.721,47.911 ; C1.1@87.503,48.436 ccw(c88.246,48.436) C1.1@87.721,47.911 ; C1.1@87.503,48.436 ccw(c88.246,48.436) C1.1@87.721,47.911 ; v3@87.503,49.682 88.036,49.149 88.036,49.124 88.536,48.624 88.536,45.034 ; C1.1@87.579,47.769 cw(c85.27,45.46) v3@88.536,45.46 ; C1.1@87.579,47.769 cw(c85.27,45.46) v3@88.536,45.46 ; C1.1@87.579,47.769 cw(c85.27,45.46) v3@88.536,45.46 ; C1.1@87.585,47.916 ccw(c86.762,48.889) v3@88.036,48.889 ; C1.1@87.585,47.916 ccw(c86.762,48.889) v3@88.036,48.889 ; C1.1@87.585,47.916 ccw(c86.762,48.889) v3@88.036,48.889 ; pad.0@87.6,65.406 pad.0@87.6,65.432 ; pad.0@87.6,65.432 87.602,65.406 87.606,65.345 87.617,65.199 pad.0@87.72,65.302 ; pad.0@87.6,65.432 87.617,65.415 pad.0@87.723,65.305 ; pad.0@87.6,65.432 87.617,65.431 87.845,65.427 pad.0@87.723,65.305 ; v3@87.6,45.309 87.68,45.229 ; C1.1@87.604,47.929 ccw(c87.234,48.641) 88.036,48.641 ; C1.1@87.604,47.929 ccw(c87.234,48.641) 88.036,48.641 ; C1.1@87.604,47.929 ccw(c87.234,48.641) 88.036,48.641 ; pad.0@87.606,65.426 ccw(c88.164,65.969) pad.0@88.509,65.27 ; pad.0@87.606,65.426 ccw(c88.164,65.969) pad.0@88.509,65.27 ; pad.0@87.606,65.426 ccw(c88.164,65.969) pad.0@88.509,65.27 ; pad.0@87.606,65.426 ccw(c88.164,65.969) pad.0@88.509,65.27 ; pad.0@87.606,65.426 ccw(c88.164,65.969) pad.0@88.509,65.27 ; pad.0@87.606,65.426 ccw(c88.164,65.969) pad.0@88.509,65.27 ; pad.0@87.612,65.41 ccw(c88.156,65.954) pad.0@88.512,65.272 ; pad.0@87.612,65.41 ccw(c88.156,65.954) pad.0@88.512,65.272 ; pad.0@87.612,65.41 ccw(c88.156,65.954) pad.0@88.512,65.272 ; pad.0@87.612,65.41 pad.0@87.617,65.406 ; pad.0@87.617,65.406 ccw(c88.155,65.943) pad.0@88.514,65.273 ; pad.0@87.617,65.405 ccw(c88.155,65.943) pad.0@88.514,65.273 ; pad.0@87.617,65.406 ccw(c88.155,65.943) pad.0@88.514,65.273 ; pad.0@87.617,65.405 ccw(c88.155,65.943) pad.0@88.514,65.273 ; pad.0@87.617,65.406 ccw(c88.155,65.943) pad.0@88.514,65.273 ; pad.0@87.617,65.405 ccw(c88.155,65.943) pad.0@88.514,65.273 ; pad.0@87.617,65.406 pad.0@87.72,65.302 ; 87.68,44.5 cw(c88.148,44.032) v3@88.555,44.554 ; 87.68,44.5 cw(c88.148,44.032) v3@88.555,44.554 ; 87.68,44.5 cw(c88.148,44.032) v3@88.555,44.554 ; 87.68,44.5 87.68,45.212 ; 87.68,44.856 cw(c88.815,44.856) v3@88.407,45.915 ; 87.68,44.856 cw(c88.815,44.856) v3@88.407,45.915 ; 87.68,44.856 cw(c88.815,44.856) v3@88.407,45.915 ; 87.68,44.932 cw(c88.709,44.932) v3@88.414,45.917 ; 87.68,44.932 cw(c88.709,44.932) v3@88.414,45.917 ; 87.68,44.932 cw(c88.709,44.932) v3@88.414,45.917 ; 87.68,45.212 ccw(c88.517,45.212) v3@88.49,44.375 ; 87.68,45.212 ccw(c88.517,45.212) v3@88.49,44.375 ; 87.68,45.212 ccw(c88.517,45.212) v3@88.49,44.375 ; 87.68,45.212 87.68,45.229 ; 87.68,45.212 87.697,45.212 ; 87.68,45.229 87.697,45.212 ; 87.697,45.212 cw(c87.697,44.296) v3@88.591,44.497 ; 87.697,45.212 ccw(c87.697,46.112) v3@88.536,45.785 ; 87.697,45.212 cw(c87.697,44.296) v3@88.591,44.497 ; 87.697,45.212 ccw(c87.697,46.112) v3@88.536,45.785 ; 87.697,45.212 cw(c87.697,44.296) v3@88.591,44.497 ; 87.697,45.212 ccw(c87.697,46.112) v3@88.536,45.785 ; 87.697,45.212 88.358,45.212 ; 87.697,45.212 v3@88.536,44.374 ; pad.0@87.713,65.316 ccw(c88.14,65.732) pad.0@88.545,65.295 ; pad.0@87.713,65.316 ccw(c88.14,65.732) pad.0@88.545,65.295 ; pad.0@87.713,65.316 ccw(c88.14,65.732) pad.0@88.545,65.295 ; pad.0@87.713,65.316 ccw(c88.14,65.732) pad.0@88.545,65.295 ; pad.0@87.713,65.316 ccw(c88.14,65.732) pad.0@88.545,65.295 ; pad.0@87.713,65.316 ccw(c88.14,65.732) pad.0@88.545,65.295 ; pad.0@87.72,65.302 ccw(c88.136,65.718) pad.0@88.548,65.298 ; pad.0@87.72,65.302 ccw(c88.136,65.718) pad.0@88.548,65.298 ; pad.0@87.72,65.302 ccw(c88.136,65.718) pad.0@88.548,65.298 ; pad.0@87.72,65.302 ccw(c88.136,65.718) pad.0@88.548,65.298 ; pad.0@87.72,65.302 ccw(c88.136,65.718) pad.0@88.548,65.298 ; pad.0@87.72,65.302 ccw(c88.136,65.718) pad.0@88.548,65.298 ; pad.0@87.72,65.302 pad.0@87.723,65.305 ; pad.0@87.72,65.302 87.96,65.062 pad.0@87.723,65.305 ; 87.744,35.827 cw(c88.185,35.386) v3@88.583,35.866 ; 87.744,35.827 cw(c88.185,35.386) v3@88.583,35.866 ; 87.744,35.827 cw(c88.185,35.386) v3@88.583,35.866 ; C1.1@87.75,47.849 cw(c88.739,47.939) 88.036,48.641 ; C1.1@87.75,47.849 cw(c88.739,47.939) 88.036,48.641 ; C1.1@87.75,47.849 cw(c88.739,47.939) 88.036,48.641 ; 87.779,36.195 cw(c87.779,35.049) v3@88.59,35.859 ; 87.779,36.195 cw(c87.779,35.049) v3@88.59,35.859 ; 87.779,36.195 cw(c87.779,35.049) v3@88.59,35.859 ; 87.779,36.195 cw(c87.779,35.049) v3@88.59,35.859 ; 87.779,36.195 cw(c87.779,35.049) v3@88.59,35.859 ; 87.779,36.195 cw(c87.779,35.049) v3@88.59,35.859 ; 87.779,36.195 cw(c87.779,35.049) v3@88.59,35.859 ; 87.779,36.195 cw(c87.779,35.049) v3@88.59,35.859 ; 87.779,36.195 cw(c87.779,35.049) v3@88.59,35.859 ; 88.036,48.641 v3@88.036,48.889 ; 88.052,38.048 ccw(c87.528,38.955) v3@88.539,38.684 ; 88.052,38.048 ccw(c87.528,38.955) v3@88.539,38.684 ; 88.052,38.048 ccw(c87.528,38.955) v3@88.539,38.684 ; 88.052,38.048 ccw(c87.528,38.955) v3@88.539,38.684 ; 88.052,38.048 ccw(c87.528,38.955) v3@88.539,38.684 ; 88.052,38.048 ccw(c87.528,38.955) v3@88.539,38.684 ; 88.236,37.97 ccw(c87.496,38.71) v3@88.543,38.71 ; 88.236,37.97 ccw(c87.496,38.71) v3@88.543,38.71 ; 88.236,37.97 ccw(c87.496,38.71) v3@88.543,38.71 ; 88.269,43.692 ccw(c87.486,44.475) v3@88.594,44.475 ; 88.269,43.692 ccw(c87.486,44.475) v3@88.594,44.475 ; 88.269,43.692 ccw(c87.486,44.475) v3@88.594,44.475 ; v3@88.31,49.194 cw(c87.766,48.65) 88.536,48.65 ; v3@88.31,49.194 cw(c87.766,48.65) 88.536,48.65 ; v3@88.31,49.194 cw(c87.766,48.65) 88.536,48.65 ; v3@88.31,49.194 cw(c87.766,48.65) 88.536,48.65 ; v3@88.31,49.194 cw(c87.766,48.65) 88.536,48.65 ; v3@88.31,49.194 cw(c87.766,48.65) 88.536,48.65 ; 88.316,37.922 ccw(c89.054,37.922) R16.2@88.9,37.2 ; 88.316,37.922 ccw(c89.054,37.922) R16.2@88.9,37.2 ; 88.316,37.922 ccw(c89.054,37.922) R16.2@88.9,37.2 ; v3@88.348,45.855 ccw(c89.095,45.593) 88.536,45.034 ; v3@88.348,45.855 ccw(c89.095,45.593) 88.536,45.034 ; v3@88.348,45.855 ccw(c89.095,45.593) 88.536,45.034 ; 88.358,45.212 cw(c87.758,44.612) v3@88.592,44.457 ; 88.358,45.212 cw(c87.758,44.612) v3@88.592,44.457 ; 88.358,45.212 cw(c87.758,44.612) v3@88.592,44.457 ; 88.358,45.212 88.536,45.034 ; 88.536,43.959 v3@88.536,44.374 ; v3@88.536,44.374 88.536,45.034 ; v3@89.049,34.587 ccw(c89.392,35.118) 89.84,34.671 ; v3@89.049,34.587 ccw(c89.392,35.118) 89.84,34.671 ; v3@89.049,34.587 ccw(c89.392,35.118) 89.84,34.671 ; v6@90.957,38.759 cw(c90.957,37.099) v6@92.131,38.273 ; v6@90.957,38.759 cw(c90.957,37.099) v6@92.131,38.273 ; v6@90.957,38.759 cw(c90.957,37.099) v6@92.131,38.273 ; 91.573,38.595 ccw(c91.959,39.263) v6@92.267,38.555 ; 91.573,38.595 ccw(c91.959,39.263) v6@92.267,38.555 ; 91.573,38.595 ccw(c91.959,39.263) v6@92.267,38.555 ; 91.573,38.595 ccw(c91.959,39.263) v6@92.267,38.555 ; 91.573,38.595 ccw(c91.959,39.263) v6@92.267,38.555 ; 91.573,38.595 ccw(c91.959,39.263) v6@92.267,38.555 ; v6@92.127,38.647 ccw(c93.023,38.647) 92.39,38.014 ; v6@92.127,38.647 ccw(c93.023,38.647) 92.39,38.014 ; v6@92.127,38.647 ccw(c93.023,38.647) 92.39,38.014 ; v6@92.298,38.718 cw(c90.629,37.049) C13.2@92.989,37.049 ; v6@92.298,38.718 cw(c90.629,37.049) C13.2@92.989,37.049 ; v6@92.298,38.718 cw(c90.629,37.049) C13.2@92.989,37.049 ; C13.2@92.736,37.667 cw(c92.269,37.2) C13.2@92.93,37.2 ; C13.2@92.736,37.667 cw(c92.269,37.2) C13.2@92.93,37.2 ; C13.2@92.736,37.667 cw(c92.269,37.2) C13.2@92.93,37.2 ; C13.2@92.989,37.612 cw(c94.569,37.612) v6@93.452,38.73 ; C13.2@92.989,37.612 cw(c94.569,37.612) v6@93.452,38.73 ; C13.2@92.989,37.612 cw(c94.569,37.612) v6@93.452,38.73 ; 92.989,38.125 cw(c93.634,38.125) v6@93.502,38.757 ; 92.989,38.125 cw(c93.634,38.125) v6@93.502,38.757 ; 92.989,38.125 cw(c93.634,38.125) v6@93.502,38.757 ; v3@95.428,65.507 cw(c94.425,64.504) v3@95.75,63.998 ; v3@95.428,65.507 cw(c94.425,64.504) v3@95.75,63.998 ; v3@95.428,65.507 cw(c94.425,64.504) v3@95.75,63.998 ; v3@95.428,65.507 96.685,64.249 ; v3@95.636,63.935 ccw(c95.87,65.065) 96.685,64.249 ; v3@95.636,63.935 ccw(c95.87,65.065) 96.685,64.249 ; v3@95.636,63.935 ccw(c95.87,65.065) 96.685,64.249 ; 105.308,79.198 ccw(c105.308,80.058) 105.917,79.45 ; 105.308,79.198 ccw(c105.308,80.058) 105.917,79.45 ; 105.308,79.198 ccw(c105.308,80.058) 105.917,79.45 ; 105.321,79.2 ccw(c105.061,80.171) 105.932,79.668 ; 105.321,79.2 ccw(c105.061,80.171) 105.932,79.668 ; 105.321,79.2 ccw(c105.061,80.171) 105.932,79.668 ; 105.321,79.2 ccw(c105.061,80.171) 105.932,79.668 ; 105.321,79.2 ccw(c105.061,80.171) 105.932,79.668 ; 105.321,79.2 ccw(c105.061,80.171) 105.932,79.668 ; 105.344,79.283 cw(c104.755,78.694) 105.588,78.694 ; 105.344,79.283 cw(c104.755,78.694) 105.588,78.694 ; 105.344,79.283 cw(c104.755,78.694) 105.588,78.694 ; 105.825,79.358 ccw(c104.563,80.62) v1@106.347,80.62 ; 105.825,79.358 ccw(c104.563,80.62) v1@106.347,80.62 ; 105.825,79.358 ccw(c104.563,80.62) v1@106.347,80.62 ; 106.005,79.539 cw(c107.723,77.821) C7.1@107.723,80.25 ; 106.005,79.539 cw(c107.723,77.821) C7.1@107.723,80.25 ; 106.005,79.539 cw(c107.723,77.821) C7.1@107.723,80.25 ; v1@106.091,80.514 ccw(c106.571,80.993) 106.571,80.315 ; v1@106.091,80.514 ccw(c106.571,80.993) 106.571,80.315 ; v1@106.091,80.514 ccw(c106.571,80.993) 106.571,80.315 ; v1@106.091,80.514 ccw(c106.571,80.993) 106.571,80.315 ; v1@106.091,80.514 ccw(c106.571,80.993) 106.571,80.315 ; v1@106.091,80.514 ccw(c106.571,80.993) 106.571,80.315 ; v1@109.31,70.968 ccw(c109.31,72.427) v1@110.342,71.395 ; v1@109.31,70.968 ccw(c109.31,72.427) v1@110.342,71.395 ; v1@109.31,70.968 ccw(c109.31,72.427) v1@110.342,71.395 ; 109.509,80.315 ccw(c109.509,81.6) v1@110.418,80.691 ; 109.509,80.315 ccw(c109.509,81.6) v1@110.418,80.691 ; 109.509,80.315 ccw(c109.509,81.6) v1@110.418,80.691 ; v1@109.601,70.968 ccw(c109.601,71.835) v1@110.369,71.431 ; v1@109.601,70.968 ccw(c109.601,71.835) v1@110.369,71.431 ; v1@109.601,70.968 ccw(c109.601,71.835) v1@110.369,71.431 ; v1@110.206,80.691 ccw(c111.115,81.6) 111.115,80.315 ; v1@110.206,80.691 ccw(c111.115,81.6) 111.115,80.315 ; v1@110.206,80.691 ccw(c111.115,81.6) 111.115,80.315 ; v1@110.381,66.176 ccw(c110.973,66.473) 110.973,65.811 ; v1@110.381,66.176 ccw(c110.973,66.473) 110.973,65.811 ; v1@110.381,66.176 ccw(c110.973,66.473) 110.973,65.811 ; v1@110.384,67.492 cw(c111.293,66.583) 111.293,67.869 ; v1@110.384,67.492 cw(c111.293,66.583) 111.293,67.869 ; v1@110.384,67.492 cw(c111.293,66.583) 111.293,67.869 ; v1@110.409,66.137 ccw(c111.196,66.924) 111.196,65.811 ; v1@110.409,66.137 ccw(c111.196,66.924) 111.196,65.811 ; v1@110.409,66.137 ccw(c111.196,66.924) 111.196,65.811 ; v1@110.409,66.349 cw(c110.848,65.91) 110.848,66.531 ; v1@110.409,66.349 cw(c110.848,65.91) 110.848,66.531 ; v1@110.409,66.349 cw(c110.848,65.91) 110.848,66.531 ; v1@110.49,66.531 v1(110.49,67.386) v1@110.49,67.437 ; v1@110.49,66.531 110.49,64.999 110.642,64.846 111.455,64.846 v1@112.42,65.811 ; v1@110.49,66.531 111.396,66.531 ; v1@110.49,67.437 cw(c109.756,66.703) v1@110.644,66.165 ; v1@110.49,67.437 cw(c109.756,66.703) v1@110.644,66.165 ; v1@110.49,67.437 cw(c109.756,66.703) v1@110.644,66.165 ; v1@110.49,67.437 111.396,66.531 ; v1@110.521,66.11 cw(c109.888,65.477) v1@110.642,64.994 ; v1@110.521,66.11 cw(c109.888,65.477) v1@110.642,64.994 ; v1@110.521,66.11 cw(c109.888,65.477) v1@110.642,64.994 ; v1@110.521,66.11 110.896,65.735 110.973,65.811 ; 110.973,65.811 v1@112.116,65.811 ; v1@111.025,82.042 cw(c111.673,82.042) 111.215,82.5 ; v1@111.025,82.042 cw(c111.673,82.042) 111.215,82.5 ; v1@111.025,82.042 cw(c111.673,82.042) 111.215,82.5 ; v1@111.025,82.042 cw(c111.673,82.042) 111.215,82.5 ; v1@111.025,82.042 cw(c111.673,82.042) 111.215,82.5 ; v1@111.025,82.042 cw(c111.673,82.042) 111.215,82.5 ; v1@111.025,82.042 cw(c111.673,82.042) 111.215,82.5 ; v1@111.025,82.042 cw(c111.673,82.042) 111.215,82.5 ; v1@111.025,82.042 cw(c111.673,82.042) 111.215,82.5 ; 111.109,80.315 ccw(c111.109,81.6) v1@112.018,80.691 ; 111.109,80.315 ccw(c111.109,81.6) v1@112.018,80.691 ; 111.109,80.315 ccw(c111.109,81.6) v1@112.018,80.691 ; 111.396,66.531 111.735,66.531 ; 111.396,66.531 111.735,66.192 ; 111.735,65.895 cw(c112.901,65.895) v1@112.32,66.907 ; 111.735,65.895 cw(c112.901,65.895) v1@112.32,66.907 ; 111.735,65.895 cw(c112.901,65.895) v1@112.32,66.907 ; 111.735,66.072 cw(c112.626,66.072) v1@112.348,66.919 ; 111.735,66.072 cw(c112.626,66.072) v1@112.348,66.919 ; 111.735,66.072 cw(c112.626,66.072) v1@112.348,66.919 ; 111.735,66.072 cw(c112.626,66.072) v1@112.348,66.919 ; 111.735,66.072 cw(c112.626,66.072) v1@112.348,66.919 ; 111.735,66.072 cw(c112.626,66.072) v1@112.348,66.919 ; 111.735,66.192 v1@112.116,65.811 ; 111.735,66.192 111.735,66.531 ; 111.735,66.531 ccw(c112.822,66.531) v1@112.297,65.578 ; 111.735,66.531 ccw(c112.822,66.531) v1@112.297,65.578 ; 111.735,66.531 ccw(c112.822,66.531) v1@112.297,65.578 ; 111.735,68.009 ccw(c113.627,68.009) v1@112.289,66.671 ; 111.735,68.009 ccw(c113.627,68.009) v1@112.289,66.671 ; 111.735,68.009 ccw(c113.627,68.009) v1@112.289,66.671 ; v1@111.806,80.691 ccw(c112.715,81.6) 112.715,80.315 ; v1@111.806,80.691 ccw(c112.715,81.6) 112.715,80.315 ; v1@111.806,80.691 ccw(c112.715,81.6) 112.715,80.315 ; v1@112.116,65.811 v1@112.42,65.811 ; v1@112.42,65.811 v1@112.42,69.621 ; 112.709,80.315 ccw(c112.709,81.6) v1@113.618,80.691 ; 112.709,80.315 ccw(c112.709,81.6) v1@113.618,80.691 ; 112.709,80.315 ccw(c112.709,81.6) v1@113.618,80.691 ; v1@113.406,80.691 ccw(c114.315,81.6) 114.315,80.315 ; v1@113.406,80.691 ccw(c114.315,81.6) 114.315,80.315 ; v1@113.406,80.691 ccw(c114.315,81.6) 114.315,80.315 ; v1@114.225,82.042 cw(c114.842,82.042) 114.406,82.478 ; v1@114.225,82.042 cw(c114.842,82.042) 114.406,82.478 ; v1@114.225,82.042 cw(c114.842,82.042) 114.406,82.478 ; v1@114.225,82.042 cw(c114.842,82.042) 114.406,82.478 ; v1@114.225,82.042 cw(c114.842,82.042) 114.406,82.478 ; v1@114.225,82.042 cw(c114.842,82.042) 114.406,82.478 ; 114.309,80.315 ccw(c114.309,81.6) v1@115.218,80.691 ; 114.309,80.315 ccw(c114.309,81.6) v1@115.218,80.691 ; 114.309,80.315 ccw(c114.309,81.6) v1@115.218,80.691 ; v1@115.006,80.691 ccw(c115.915,81.6) 115.915,80.315 ; v1@115.006,80.691 ccw(c115.915,81.6) 115.915,80.315 ; v1@115.006,80.691 ccw(c115.915,81.6) 115.915,80.315 ; v1@115.1,83.151 ccw(c115.524,84.06) 115.867,83.117 ; v1@115.1,83.151 ccw(c115.524,84.06) 115.867,83.117 ; v1@115.1,83.151 ccw(c115.524,84.06) 115.867,83.117 ; v1@115.1,83.151 ccw(c115.524,84.06) 115.867,83.117 ; v1@115.1,83.151 ccw(c115.524,84.06) 115.867,83.117 ; v1@115.1,83.151 ccw(c115.524,84.06) 115.867,83.117 ; v1@115.164,83.137 ccw(c115.164,84.246) 115.948,83.462 ; v1@115.164,83.137 ccw(c115.164,84.246) 115.948,83.462 ; v1@115.164,83.137 ccw(c115.164,84.246) 115.948,83.462 ; 115.336,82.85 cw(c116.815,81.371) v1@116.815,83.462 ; 115.336,82.85 cw(c116.815,81.371) v1@116.815,83.462 ; 115.336,82.85 cw(c116.815,81.371) v1@116.815,83.462 ; v1@115.825,82.042 cw(c116.503,82.042) 116.024,82.521 ; v1@115.825,82.042 cw(c116.503,82.042) 116.024,82.521 ; v1@115.825,82.042 cw(c116.503,82.042) 116.024,82.521 ; v1@115.825,82.042 cw(c116.503,82.042) 116.024,82.521 ; v1@115.825,82.042 cw(c116.503,82.042) 116.024,82.521 ; v1@115.825,82.042 cw(c116.503,82.042) 116.024,82.521 ; v1@115.825,82.042 cw(c116.503,82.042) 116.024,82.521 ; v1@115.825,82.042 cw(c116.503,82.042) 116.024,82.521 ; v1@115.825,82.042 cw(c116.503,82.042) 116.024,82.521 ; v1@115.825,82.042 cw(c116.503,82.042) 116.024,82.521 ; v1@115.825,82.042 cw(c116.503,82.042) 116.024,82.521 ; v1@115.825,82.042 cw(c116.503,82.042) 116.024,82.521 ; v1@115.825,82.042 cw(c116.503,82.042) 116.024,82.521 ; v1@115.825,82.042 cw(c116.503,82.042) 116.024,82.521 ; v1@115.825,82.042 cw(c116.503,82.042) 116.024,82.521 ; v1@115.825,82.042 cw(c116.503,82.042) 116.024,82.521 ; v1@115.825,82.042 cw(c116.503,82.042) 116.024,82.521 ; v1@115.825,82.042 cw(c116.503,82.042) 116.024,82.521 ; 115.909,80.315 ccw(c115.909,81.6) v1@116.818,80.691 ; 115.909,80.315 ccw(c115.909,81.6) v1@116.818,80.691 ; 115.909,80.315 ccw(c115.909,81.6) v1@116.818,80.691 ; v1@116.606,80.691 ccw(c117.515,81.6) 117.515,80.315 ; v1@116.606,80.691 ccw(c117.515,81.6) 117.515,80.315 ; v1@116.606,80.691 ccw(c117.515,81.6) 117.515,80.315 ; v1@116.665,83.302 ccw(c117.17,83.336) 117.17,82.829 ; v1@116.665,83.302 ccw(c117.17,83.336) 117.17,82.829 ; v1@116.665,83.302 ccw(c117.17,83.336) 117.17,82.829 ; v1@116.684,83.239 cw(c117.496,83.693) 116.838,84.351 ; v1@116.684,83.239 cw(c117.496,83.693) 116.838,84.351 ; v1@116.684,83.239 cw(c117.496,83.693) 116.838,84.351 ; v1@116.709,83.206 ccw(c117.618,84.115) 117.618,82.829 ; v1@116.709,83.206 ccw(c117.618,84.115) 117.618,82.829 ; v1@116.709,83.206 ccw(c117.618,84.115) 117.618,82.829 ; 116.838,84.351 117.17,84.684 ; v1@116.919,83.204 ccw(c116.351,83.795) 117.17,83.795 ; v1@116.919,83.204 ccw(c116.351,83.795) 117.17,83.795 ; v1@116.919,83.204 ccw(c116.351,83.795) 117.17,83.795 ; v1@116.919,83.204 ccw(c116.351,83.795) 117.17,83.795 ; v1@116.919,83.204 ccw(c116.351,83.795) 117.17,83.795 ; v1@116.919,83.204 ccw(c116.351,83.795) 117.17,83.795 ; v1@116.921,83.206 ccw(c116.318,83.808) 117.17,83.808 ; v1@116.921,83.206 ccw(c116.318,83.808) 117.17,83.808 ; v1@116.921,83.206 ccw(c116.318,83.808) 117.17,83.808 ; v1@116.921,83.418 cw(c116.318,82.816) 117.17,82.816 ; v1@116.921,83.418 cw(c116.318,82.816) 117.17,82.816 ; v1@116.921,83.418 cw(c116.318,82.816) 117.17,82.816 ; 117.17,82.829 117.17,83.795 ; 117.17,82.829 118.643,82.829 ; 117.17,83.795 117.78,84.404 ; 117.17,83.795 117.17,84.684 ; v1@117.468,82.11 cw(c118.643,81.51) 118.643,82.829 ; v1@117.468,82.11 cw(c118.643,81.51) 118.643,82.829 ; v1@117.468,82.11 cw(c118.643,81.51) 118.643,82.829 ; 117.586,82.829 ccw(c117.586,84.115) v1@118.495,83.206 ; 117.586,82.829 ccw(c117.586,84.115) v1@118.495,83.206 ; 117.586,82.829 ccw(c117.586,84.115) v1@118.495,83.206 ; 117.78,84.404 ccw(c119.457,84.404) v1@118.285,83.205 ; 117.78,84.404 ccw(c119.457,84.404) v1@118.285,83.205 ; 117.78,84.404 ccw(c119.457,84.404) v1@118.285,83.205 ; 117.78,84.404 117.78,83.337 118.529,83.337 118.643,83.223 118.643,82.829 ; 117.945,84.747 cw(c116.51,83.312) v1@118.539,83.312 ; 117.945,84.747 cw(c116.51,83.312) v1@118.539,83.312 ; 117.945,84.747 cw(c116.51,83.312) v1@118.539,83.312 ; v1@118.282,83.207 ccw(c119.875,84.767) 119.875,82.537 ; v1@118.282,83.207 ccw(c119.875,84.767) 119.875,82.537 ; v1@118.282,83.207 ccw(c119.875,84.767) 119.875,82.537 ; v1@118.385,83.462 cw(c118.441,81.561) 119.786,82.906 ; v1@118.385,83.462 cw(c118.441,81.561) 119.786,82.906 ; v1@118.385,83.462 cw(c118.441,81.561) 119.786,82.906 ; v1@118.495,83.418 cw(c118.138,83.061) 118.643,83.061 ; v1@118.495,83.418 cw(c118.138,83.061) 118.643,83.061 ; v1@118.495,83.418 cw(c118.138,83.061) 118.643,83.061 ; 118.497,80.315 ccw(c118.497,82.074) BT.2@119.741,80.83 ; 118.497,80.315 ccw(c118.497,82.074) BT.2@119.741,80.83 ; 118.497,80.315 ccw(c118.497,82.074) BT.2@119.741,80.83 ; 119.158,80.494 cw(c119.586,79.751) BT.2@119.808,80.579 ; 119.158,80.494 cw(c119.586,79.751) BT.2@119.808,80.579 ; 119.158,80.494 cw(c119.586,79.751) BT.2@119.808,80.579 ; 119.786,82.906 123.546,82.906 ; 123.546,82.906 124.384,82.906 124.663,82.906 ; v3@86.177,62.921 ccw(c84.753,64.345) 86.766,64.345 cw(c84.753,64.345) v3@86.177,62.921 ; pad.0@86.228,64.714 cw(c84.927,63.413) 86.766,63.413 ccw(c84.927,63.413) pad.0@86.228,64.714 ; 86.766,63.052 cw(c87.687,63.052) 87.395,63.925 ccw(c87.687,63.052) 86.766,63.052 ; 86.766,64.144 cw(c88.288,64.144) 87.212,65.22 ccw(c88.288,64.144) 86.766,64.144 ; pad.0@86.766,65.183 ccw(c88.78,65.183) 87.356,63.759 cw(c88.78,65.183) pad.0@86.766,65.183
  Top Layer w1.1: v9@90.043,39.472 v9(90.043,41.123)
  Top Layer w1.5: 105.156,71.704 105.893,70.968 v1(106.375,70.968) v1(107.391,70.968) v1(108.407,70.968) v1@109.271,70.968 ; v1@105.156,71.933 105.131,71.958 105.131,73.483 105.131,73.575 105.131,79.959 106.782,81.61 ; 118.285,81.407 118.407,81.407 118.75,81.153
  Bottom Layer w0.254: v2@81.227,77.472 cw(c81.591,77.108) 81.591,77.622 ; v2@81.227,77.472 cw(c81.591,77.108) 81.591,77.622 ; v2@81.227,77.472 cw(c81.591,77.108) 81.591,77.622 ; v2@81.227,77.773 ccw(c81.591,78.137) 81.591,77.622 ; v2@81.227,77.773 ccw(c81.591,78.137) 81.591,77.622 ; v2@81.227,77.773 ccw(c81.591,78.137) 81.591,77.622
  Bottom Layer w0.4: SPI2.8@106.375,100.223 106.375,102.273 ; 106.375,101.327 ccw(c107.31,101.327) SPI2.8@106.649,100.666 ; 106.375,101.327 ccw(c107.31,101.327) SPI2.8@106.649,100.666 ; 106.375,101.327 ccw(c107.31,101.327) SPI2.8@106.649,100.666